# Altium PCB 发光陀螺.PcbDoc
Units mil, origin at the board's own origin, x right, y up, seen from the top; angles counter-clockwise.
Board outline 2519.68 x 2519.68 mil, 2 copper layers (Top Layer, Bottom Layer); 17 components, 11 nets, 36 pads, 4 vias.
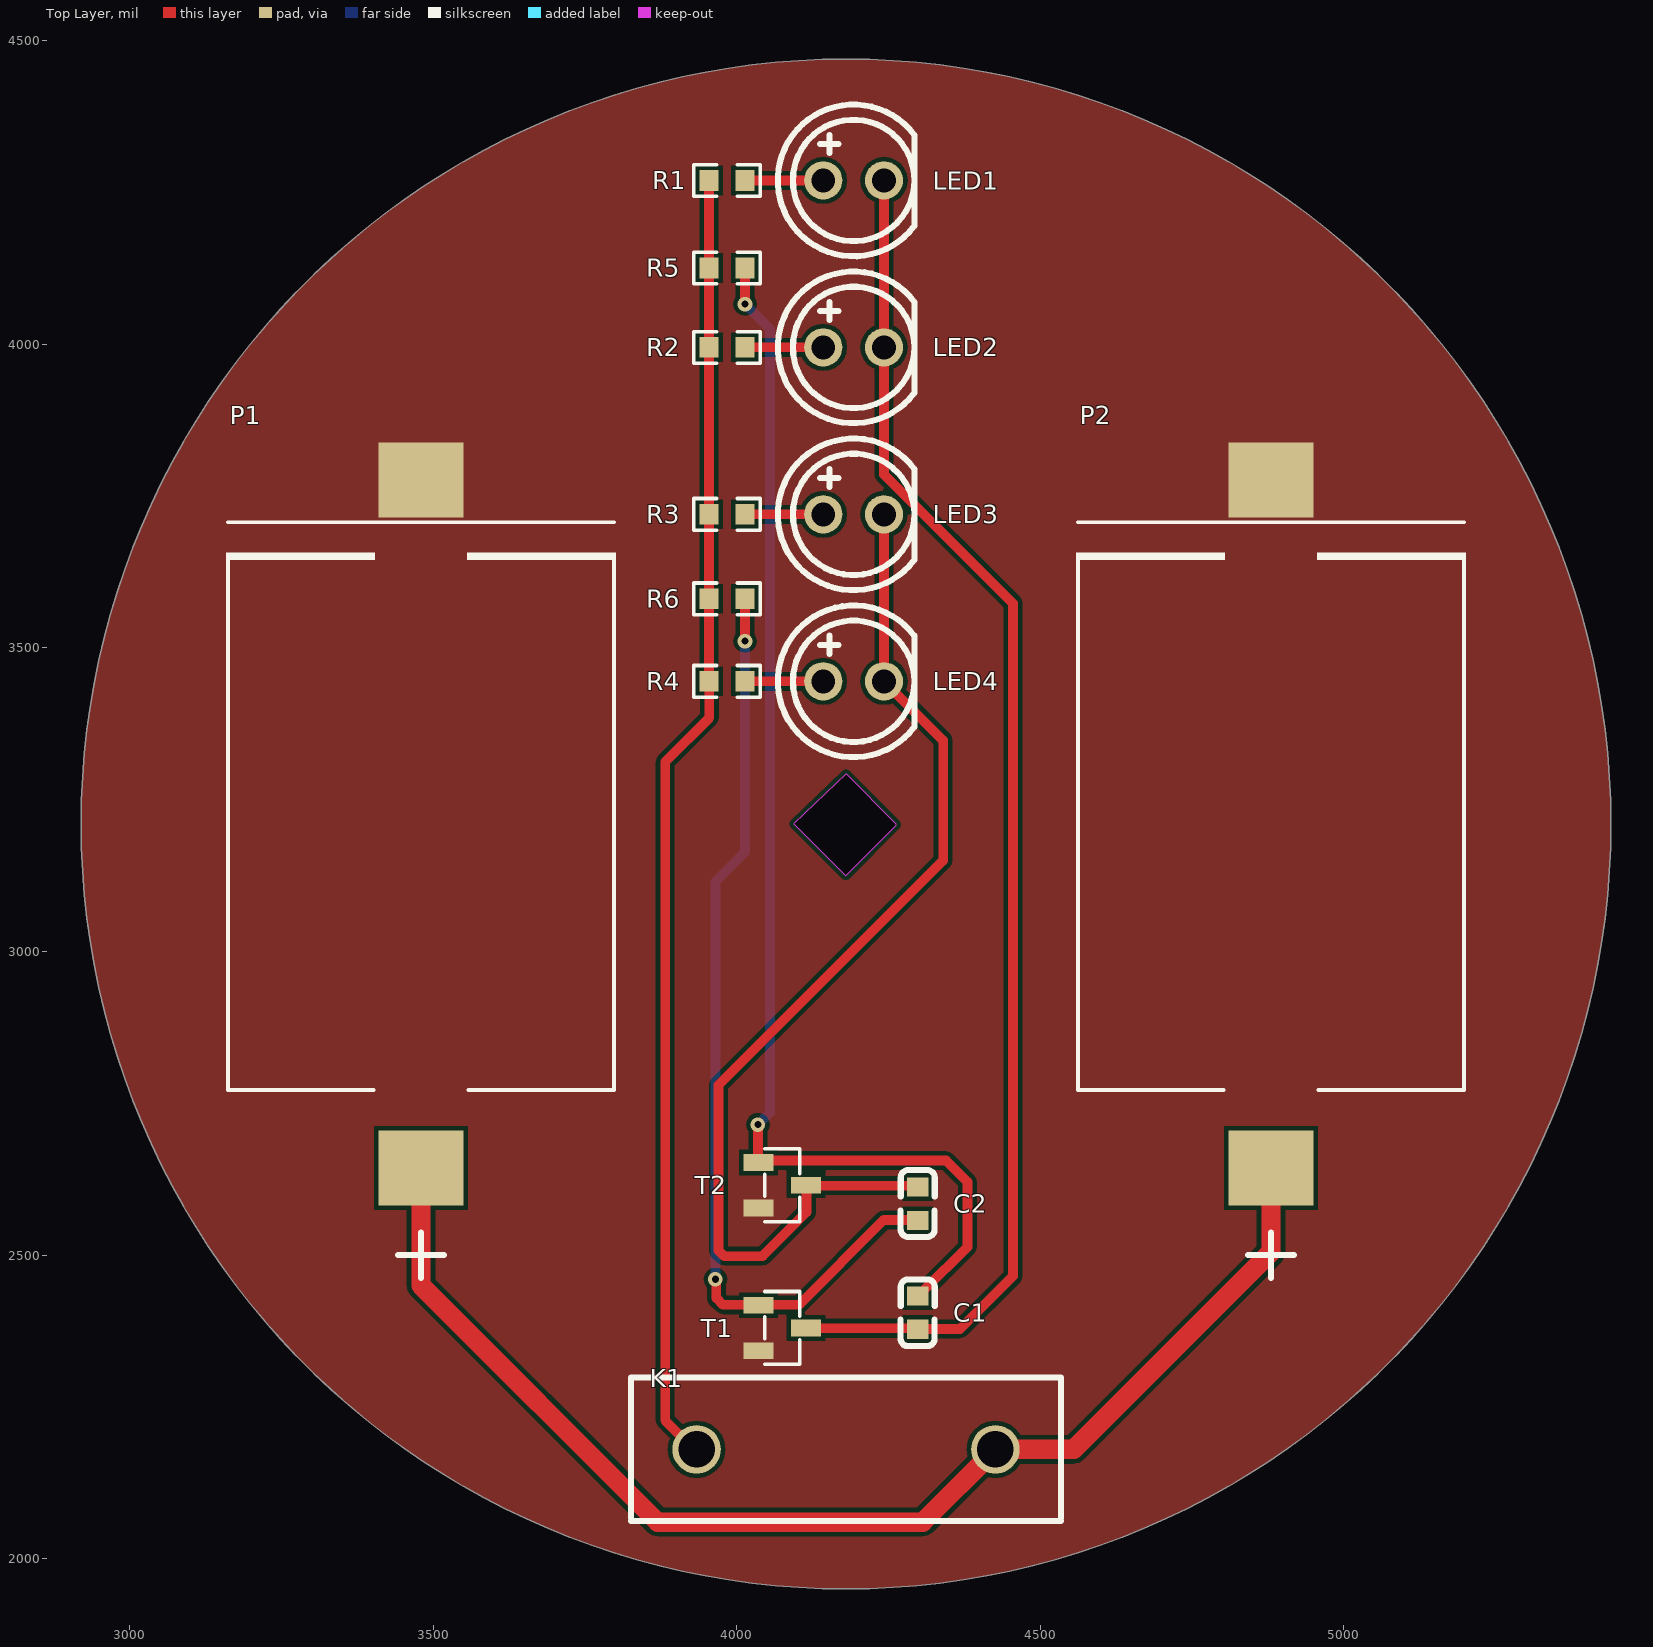
[diagram p0: Top Layer view]
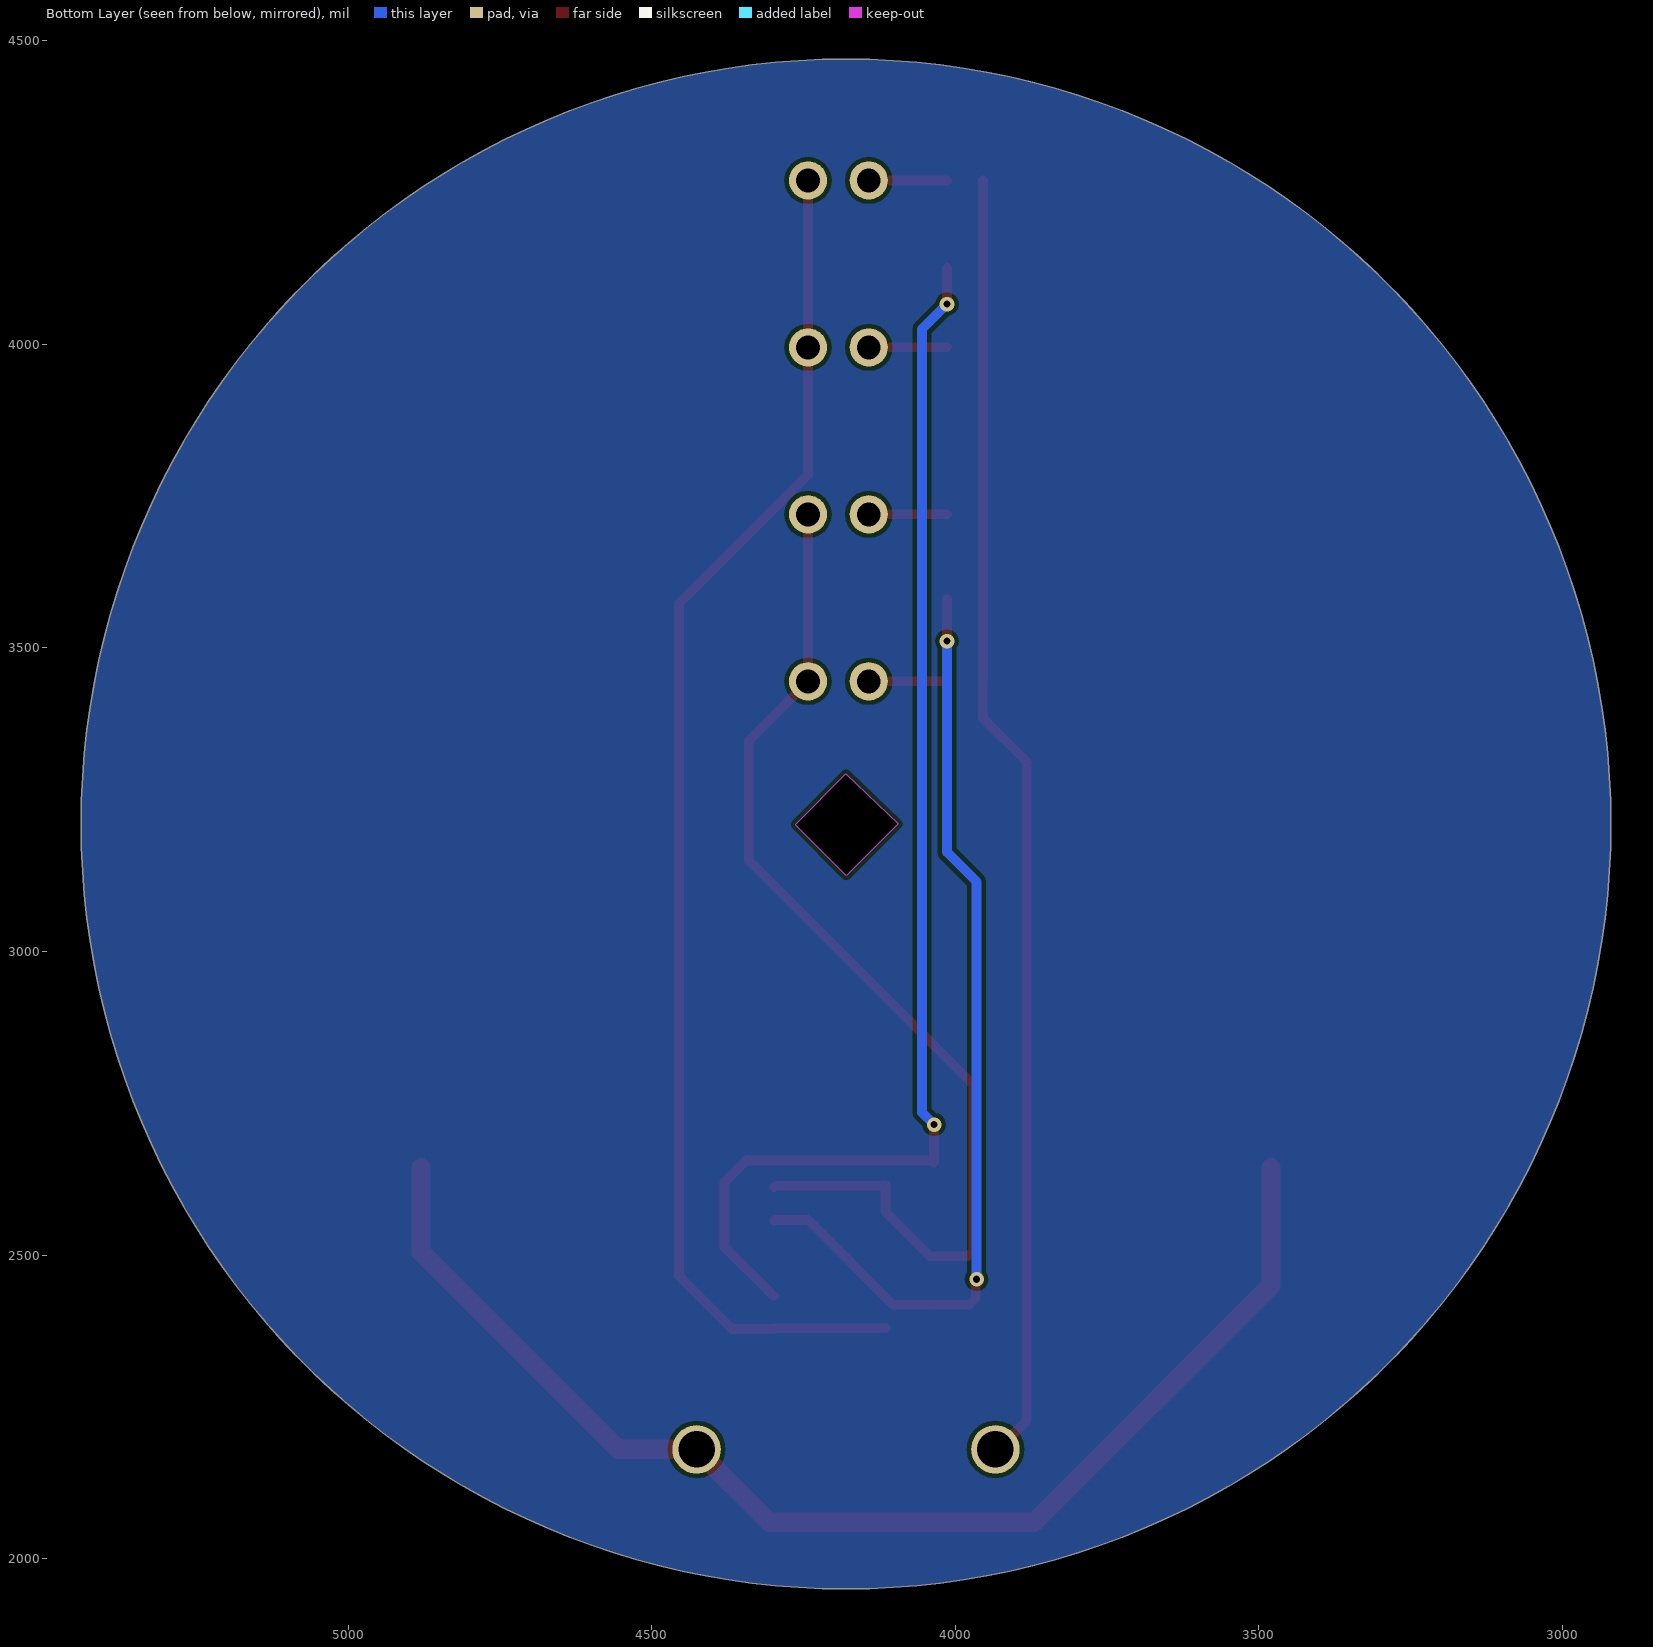
[diagram p1: Bottom Layer view, seen from below]

## Layer stack, top to bottom
Top Solder: solder mask 0.4, Solder Resist, Dk 3.5
Top Layer: signal copper 1.4
Dielectric 1: dielectric 12.6, FR-4, Dk 4.8
Bottom Layer: signal copper 1.4
Bottom Solder: solder mask 0.4, Solder Resist, Dk 3.5

## Board outline
2920.16,3210 ccw(c4180,3210) 4180,1950.16 ccw(c4180,3210) 5439.84,3210 ccw(c4180,3210) 4180,4469.84 ccw(c4180,3210)
cut-out: 4180,3292.68 4093.89,3210 4179.44,3124.44 4262.68,3207.68 4262.68,3210

## Design rules (kind name [scope] priority, off if disabled: settings)
Clearance [All] p1: gap=7 ignorepadtopadclearanceinfootprint=FALSE
PolygonConnect [All] p1: connectstyle=Direct reliefconductorwidth=10 reliefentries=4 polygonreliefangle="90 Angle" airgapwidth=10
RoutingVias [All] p1: holewidth=28 width=50 viastyle="Through Hole" minholewidth=28 minwidth=50 maxholewidth=28 maxwidth=50
SolderMaskExpansion [All] p1: expansion=4 istentingtop=FALSE
Width [All] p1: maxlimit=100 minlimit=10 preferedwidth=16
30 further rules are at their usual default settings.

## Components (designator, comment, footprint, x,y, rotation, side; value= is the part's Value field where it differs from the comment)
C1 "100nF" 0603_C 4301.12,2405 r90 top
C2 "100nF" 0603_C 4295,2585 r270 top
K1 "振动传感器" SW-28020 4180,2180 r180 top
LED1 "LED" "LED 2.54mm 直插式 5mm" 4192.5,4270 r0 top
LED2 "LED" "LED 2.54mm 直插式 5mm" 4192.5,3995 r0 top
LED3 "LED" "LED 2.54mm 直插式 5mm" 4192.5,3720 r0 top
LED4 "LED" "LED 2.54mm 直插式 5mm" 4192.5,3445 r0 top
P1 "CR2032 3V" CR2032_电池座 3480,3210 r270 top
P2 "CR2032 3V" CR2032_电池座 4880,3210 r270 top
R1 "1K" 0603_R 3985,4269.12 r180 top
R2 "1K" 0603_R 3985,3994.12 r180 top
R3 "1K" 0603_R 3985,3719.12 r180 top
R4 "1K" 0603_R 3985,3444.12 r180 top
R5 "1M" 0603_R 3985,4125 r180 top
R6 "1M" 0603_R 3985,3580 r180 top
T1 "S9013" SOT-23-3 4075,2380 r180 top
T2 "S9013" SOT-23-3 4075,2615 r180 top

## Footprints (in the part's own frame and the unit in brackets; to place one, negate y for a bottom-side part, rotate by r counter-clockwise, add the part's x,y. Pads: shape width x height; smd on the part's side, far side on the other; paste and mask are expansions set on the pad)
0603_C [mm] "SMD, 0603"
  rect 0.8x0.9 smd: 1(-0.691,0.075) 2(0.708,0.075)
  silkscreen extent -1.4,-0.64 1.4,0.79
0603_R [mil] "SMD, 0603"
  rect 31.75x34.02 smd: 1(-28.7,-0.88) 2(30.61,-0.88)
  silkscreen extent -54,-27 55,25
CR2032_电池座 [mm] "CR2032-BS-6-1"
  rect 3.13x3.56 smd: 1(14.385,0) 2(-14.385,0)
  silkscreen extent -12.62,-8.15 11.13,8.15
"LED 2.54mm 直插式 5mm" [mm]
  round 1.6 hole 1: 1(-1.27,0) 2(1.27,0)
  silkscreen extent -3.17,-3.17 2.54,3.17
SOT-23-3 [mm] "SOT-23-3_L2.9-W1.3-P1.90-LS2.4-BR"
  rect 1.25x0.7 smd: 1(1,-0.95) 2(1,0.95) 3(-1,0)
  silkscreen extent -0.73,-1.53 0.73,1.53
SW-28020 [mil] "震动开关"
  round 80 hole 60: 1(-246.06,0) 2(246.06,0)
  silkscreen extent -354,-118 354,118

## Part data
C1 C2: library part CAP, "Capacitor"
K1: "Key,振荡传感器"
P1 P2: library part 纽扣电池电池座, "电源接口"
R1 R2 R3 R4 R5 R6: library part RES, "Resistor"
T1 T2: "NPN"

## Via types
v1: diameter 24, hole 12, Top Layer to Bottom Layer, 4 vias

## Nets (pads, with @x,y where several pads share a name; then routed paths per layer and width w, separated by ;. In a path a pad name is that pad's centre, name@x,y a point inside that pad or via, vN(x,y) a via of type N, cw(c..) or ccw(c..) an arc to the next point about the centre after c; other vN are vias at no path point)
GND: P1.2 P2.2 T1.2 T2.2
NetC1_1: C1.1 LED1.2 LED2.2 T1.3 | length 2270.3
  Top Layer w16: T1.3 4114.85,2379.52 4296.42,2379.52 C1.1 4298.8,2378.41 4367.76,2378.41 4454.98,2465.63 4454.98,3573.27 4242.5,3785.76 LED2.2 LED1.2
NetC1_2: C1.2 R5.1 T2.1 | length 2082.1
  Top Layer w16: v1(4013.7,4066.3) R5.1 ; v1(4035,2715) 4034.98,2653.05 T2.1 4038.86,2655.63 4344.98,2655.63 4379.98,2620.63 4379.98,2513.38 4307.88,2441.29 4307.88,2440.64 4300.14,2432.89 C1.2
  Bottom Layer w16: v1(4013.7,4066.3) 4055,4025 4055,2735 v1(4035,2715)
NetC2_1: C2.1 LED3.2 LED4.2 T2.3 | length 1813.6
  Top Layer w16: T2.3 4114.37,2609.84 4114.98,2609.22 4114.98,2570.63 4042.61,2498.26 3979.36,2498.26 3969.98,2507.63 3969.98,2779.98 4340,3150 4340,3347.5 LED4.2 LED3.2 ; T2.3@4114.98,2615 4115.74,2614.24 4295.93,2614.24 C2.1
NetC2_2: C2.2 R6.1 T1.1 | length 1567.3
  Top Layer w16: v1(3965,2460) 3966.51,2458.49 3966.51,2429.1 3977.58,2418.03 4035,2418.03 T1.1 4036.26,2418.03 4102.38,2418.03 4242.09,2557.74 4297.32,2557.74 C2.2 ; v1(4013.7,3511.3) R6.1
  Bottom Layer w16: v1(3965,2460) 3965,3115 4013.7,3163.7 v1(4013.7,3511.3)
NetK1_2: K1.2 R1.2 R2.2 R3.2 R4.2 R5.2 R6.2 | length 2144.2
  Top Layer w16: K1.2 3930,2180 3882.11,2227.89 3882.11,3312.11 3955,3385 3955,3444.39 R4.2 R6.2 R3.2 R2.2 R5.2 R1.2
NetLED1_1: LED1.1 R1.1 | length 128.8
  Top Layer w16: R1.1 LED1.1
NetLED2_1: LED2.1 R2.1 | length 128.8
  Top Layer w16: R2.1 LED2.1
NetLED3_1: LED3.1 R3.1 | length 128.8
  Top Layer w16: R3.1 LED3.1
NetLED4_1: LED4.1 R4.1 | length 128.8
  Top Layer w16: R4.1 LED4.1
VCC: K1.1 P1.1 P2.1 | length 2078.2
  Top Layer w32: P1.1 3480,2450 3870,2060 4306.06,2060 K1.1 4555,2180 4880,2505 P2.1

## Polygon pours and split planes (outlines as drawn)
GND on Bottom Layer "GND_L02_P001" (solid, pour order 1): 2920.16,3210 ccw(c4180,3210) 4180,1950.16 ccw(c4180,3210) 5439.84,3210 ccw(c4180,3210) 4180,4469.84 ccw(c4180,3210)
GND on Top Layer "GND_L01_P002" (solid, pour order 2): 2920.16,3210 ccw(c4180,3210) 4180,1950.16 ccw(c4180,3210) 5439.84,3210 ccw(c4180,3210) 4180,4469.84 ccw(c4180,3210)

## Silkscreen, mask and mechanical layers (free items; w line width, h text height)
Top Overlay:
  lines w10: 3442.5,2500 3517.5,2500 ; 3480,2462.5 3480,2537.5 ; 4842.5,2500 4917.5,2500 ; 4880,2462.5 4880,2537.5
Mechanical 1:
  circle w10: c4180,3210 r82.68
  circle w10: c4180,3210 r1259.84
  lines w47.24: 2920.16,3210 cw(c4180,3210) 4180,4469.84 cw(c4180,3210) 5439.84,3210 cw(c4180,3210) 4180,1950.16 cw(c4180,3210) 2920.16,3210